# Altium PCB V5.pcbdoc
Units mil, origin at the board's own origin, x right, y up, seen from the top; angles counter-clockwise.
Board outline 9149.63 x 2076.45 mil, 2 copper layers (Top Layer, Bottom Layer); 46 components, 58 nets, 215 pads, 23 vias.
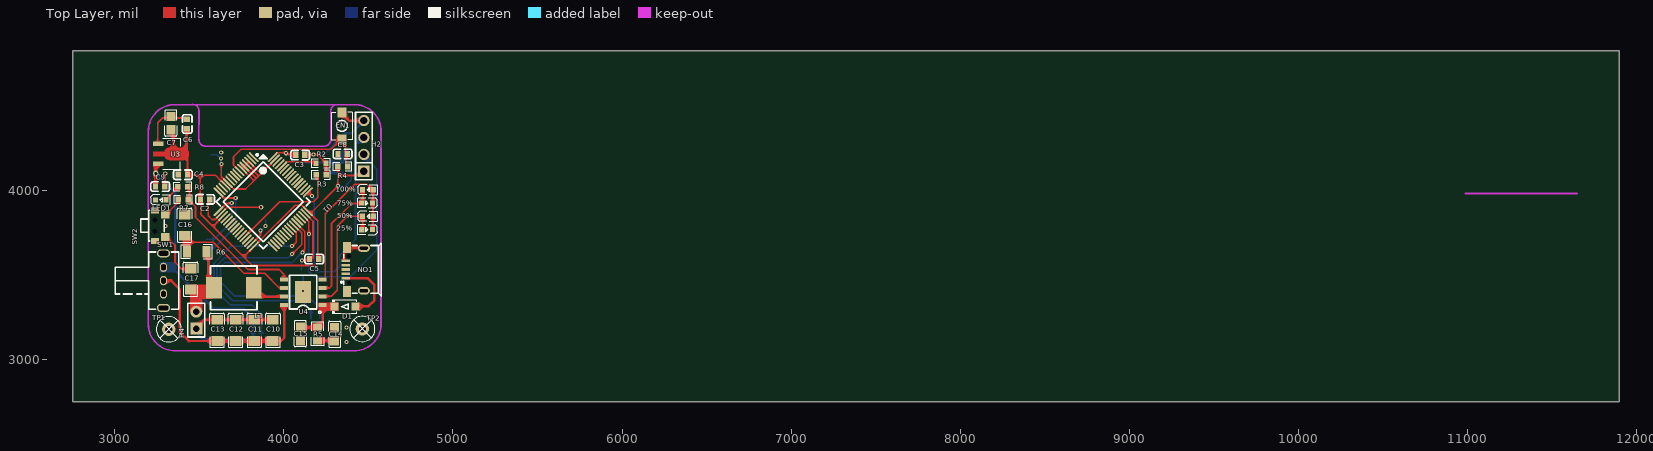
[diagram p0: Top Layer view]
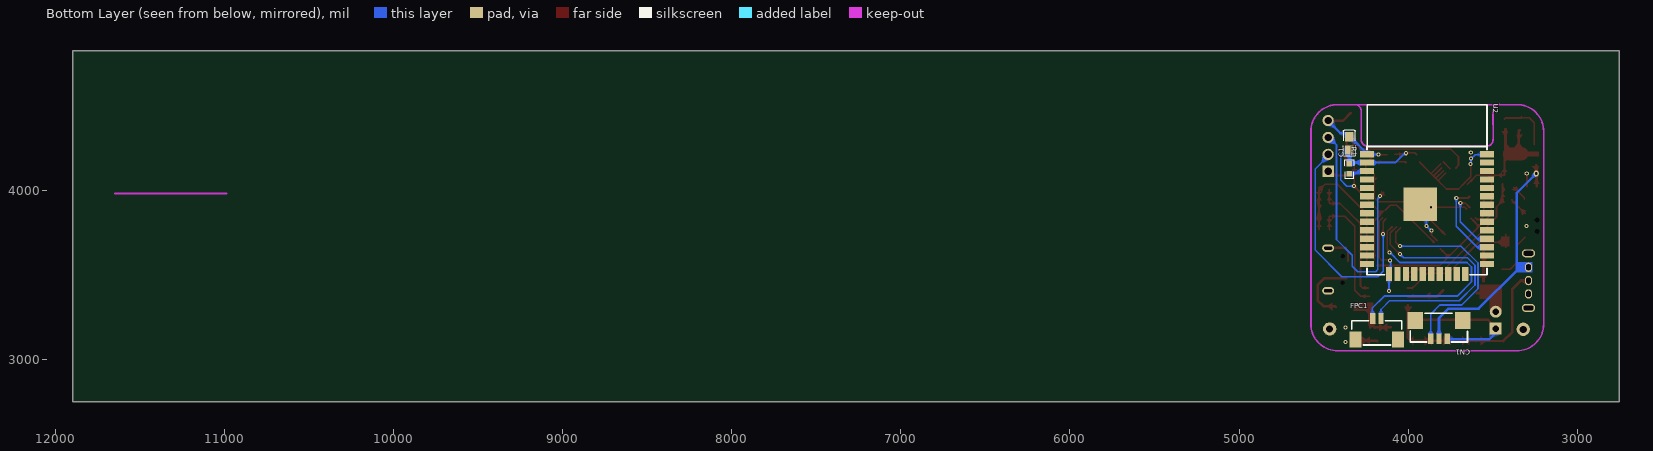
[diagram p1: Bottom Layer view, seen from below]

## Layer stack, top to bottom
Top Layer: signal copper (thickness not stored)
Dielectric: dielectric 12.6, FR-4, Dk 4.8
Bottom Layer: signal copper (thickness not stored)

## Board outline
11899.63,2750 2750,2750 2750,4826.45 11899.63,4826.45

## Components (designator, comment, footprint, x,y, rotation, side; value= is the part's Value field where it differs from the comment)
25% "19-217/GHC-YR1S2/3T" LED0603-RD 4492.49,3767.58 r180 top
50% "19-217/GHC-YR1S2/3T" LED0603-RD 4496.39,3845.94 r0 top
75% "19-217/GHC-YR1S2/3T" LED0603-RD 4492.49,3925.14 r180 top
100% "19-217/GHC-YR1S2/3T" LED0603-RD 4496.39,4003.5 r0 top
C1 "10uF" C0805 4348.06,4277.97 r90 bottom
C2 "104" C0603 3534.18,3946.59 r0 top
C3 "104" C0603 4096.66,4207.64 r0 top
C4 "104" C0603 3401.76,4092.08 r180 top
C5 "104" C0603 4178.86,3593.36 r180 top
C6 "104" C0603 3428.18,4392.18 r270 top
C7 "10uF" C0805 3330.9,4397.13 r90 top
C8 "104" C0603 4347.53,4215.42 r0 top
C9 "104" C0603 3267.96,4021.94 r180 top
C10 "C3216X5R1V226MTJ00E" C1206 3935.08,3171.52 r270 top
C11 "C3216X5R1V226MTJ00E" C1206 3824.84,3171.52 r270 top
C12 "C3216X5R1V226MTJ00E" C1206 3714.61,3171.52 r270 top
C13 "C3216X5R1V226MTJ00E" C1206 3604.37,3171.52 r270 top
C14 "GRM21BR61H106KE43L" C0805 4300.51,3148.73 r270 top
C15 "GRM21BR61H106KE43L" C0805 4097.14,3150.51 r90 top
C16 "C3216X5R1V226MTJ00E" C1206 3413.23,3794.18 r270 top
C17 "C3216X5R1V226MTJ00E" C1206 3447.86,3474.95 r270 top
CN1 "HC-1.25-3PLT" CONN-SMD_HC-1.25-3PLT 3817.61,3175.45 r0 bottom
D1 "SS14_C2909920" SOD-123FL_L2.8-W1.8-LS3.7-RD 4361.08,3311.51 r0 top
EN1 "TSA343G00-250J2" SW-SMD_L4.0-W2.9-LS5.0 4342.77,4380.98 r90 top
FPC1 "1.25-2PS" CONN-SMD_2P-P1.25_DEALON_1.25-2PS 4184.82,3179.15 r180 bottom
H2 "PH-00015" HDR-TH_4P-P2.54-V-M 4472.93,4262.57 r90 top
H4 "电源输入" HDR-TH_2P-P2.54-V-M-1 3481.8,3231.81 r90 top
L1 "FXL0618-1R0-M" IND-SMD_L7.0-W6.6 3703.43,3422.78 r180 top
LED1 "19-217/GHC-YR1S2/3T" LED0603-RD 3271.44,3943.17 r0 top
NO1 "MICROUSB-5PIN" USB-SMD_5P_MICROUSB-5PIN 4419.71,3531.75 r90 top
R1 "10k" R0603 4347.39,4127.14 r270 bottom
R2 "0603WAF1003T5E" R0603 4219.65,4159.81 r0 top
R3 "0603WAF1003T5E" R0603 4220.42,4091.93 r0 top
R4 "ERA3VEB1001V" R0603 4347.31,4141.24 r0 top
R5 "0805W8F200KT5E" R0805 4198.66,3150.58 r90 top
R6 "1206W4F500LT5E" R1206 3484.33,3636.82 r0 top
R7 "0603WAF1002T5E" R0603 3404.51,3945.59 r0 top
R8 "0603WAF200JT5E" R0603 3401.47,4021.22 r0 top
SW1 "SK-12D02-VG5_C136722" SW-TH_SK-12D02-VG5 3287.79,3465.8 r270 top
SW2 "TS24CA" SW-SMD_TS24CA 3267.19,3790.89 r90 top
TP1 "M2螺丝" M2螺丝 3319.05,3177.61 r0 top
TP2 "M2螺丝" M2螺丝 4463.85,3179.94 r0 top
U1 "STM32F103RCT6" LQFP-64_L10.0-W10.0-P0.50-LS12.0-BL 3877.67,3931.85 r225 top
U2 "ESP32-WROOM-32D-N4_C473012" WIFIM-SMD_39P-L25.5-W18.0-P1.27-BL 3887.77,3859.02 r270 bottom
U3 "AMS1117-3.3_C880752" SOT-89-3_L4.5-W2.5-P1.50-LS4.2-BR 3310.66,4215.71 r180 top
U4 "IP5306" ESOP-8_L4.9-W3.9-P1.27-LS6.0-BL-EP 4113.88,3397.99 r90 top

## Footprints (in the part's own frame and the unit in brackets; to place one, negate y for a bottom-side part, rotate by r counter-clockwise, add the part's x,y. Pads: shape width x height; smd on the part's side, far side on the other; paste and mask are expansions set on the pad)
C0603 [mm]
  rect 0.8x0.9 smd paste+0 mask+0.051: 1(-0.7,0) 2(0.7,0)
  silkscreen extent -1.41,-0.71 1.39,0.72
C0805 [mm]
  rect 1.41x1.35 smd paste-100 mask+0.051: 1(-1,0) 2(1,0)
  silkscreen extent -1.96,-0.9 1.96,0.9
C1206 [mm]
  rect 1.485x1.728 smd paste-100 mask+0.051: 1(-1.593,0) 2(1.593,0)
  silkscreen extent -2.56,-1.09 2.56,1.09
CONN-SMD_2P-P1.25_DEALON_1.25-2PS [mm]
  rect 0.8x1.6 smd paste+0 mask+0.05: 1(-0.625,1.6) 2(0.625,1.6)
  rect 1.8x2.4 smd paste+0 mask+0.05: 3(-3.175,-1.6) 4(3.175,-1.6)
  silkscreen extent -3.75,-2.4 3.75,1.25
CONN-SMD_HC-1.25-3PLT [mm]
  rect 0.8x1.6 smd paste+0 mask+0.05: 1(-1.25,1.38) 2(0,1.38) 3(1.25,1.38)
  rect 2.35x2.5 smd paste+0 mask+0.05: 4(-3.575,-1.38) 5(3.575,-1.38)
  silkscreen extent -4.3,-2.45 4.3,1.85
ESOP-8_L4.9-W3.9-P1.27-LS6.0-BL-EP [mm]
  rect 0.6x1.2 smd paste+0 mask+0.051: 1(-1.905,-2.908) 2(-0.635,-2.908) 3(0.635,-2.908) 4(1.905,-2.908) 5(1.905,2.908) 6(0.635,2.908) 7(-0.635,2.908) 8(-1.905,2.908)
  rect 3.3x2.4 smd paste+0 mask+0.051: 9(0,0)
  silkscreen extent -3.2,-2.67 2.55,2.05
HDR-TH_2P-P2.54-V-M-1 [mm]
  rect 1.8x1.8 hole 1 paste+0 mask+0.051: 1(-1.27,0)
  round 1.8 hole 1 paste+0 mask+0.051: 2(1.27,0)
  silkscreen extent -2.54,-1.27 2.54,1.27
HDR-TH_4P-P2.54-V-M [mm]
  rect 1.7x1.7 hole 1.1 paste+0 mask+0.051: 1(-3.81,0)
  round 1.7 hole 1.1 paste+0 mask+0.051: 2(-1.27,0) 3(1.27,0) 4(3.81,0)
  silkscreen extent -5.08,-1.27 5.08,1.27
IND-SMD_L7.0-W6.6 [mm]
  rect 2.4x3.2 smd paste+0 mask+0.051: 1(-3,0) 2(3,0)
  silkscreen extent -3.5,-3.3 3.5,3.3
LED0603-RD [mm]
  rect 0.8x0.8 smd paste+0 mask+0.051: 1(-0.799,-0.003) 2(0.799,0.003)
  silkscreen extent -1.49,-0.75 1.39,0.76
LQFP-64_L10.0-W10.0-P0.50-LS12.0-BL [mm]
  oval 0.3x2 smd paste+0 mask+0.051: 1(-3.75,-5.75) 2(-3.25,-5.75) 3(-2.75,-5.75) 4(-2.25,-5.75) 5(-1.75,-5.75) 6(-1.25,-5.75) 7(-0.75,-5.75) 8(-0.25,-5.75) 9(0.25,-5.75) 10(0.75,-5.75) 11(1.25,-5.75) 12(1.75,-5.75) 13(2.25,-5.75) 14(2.75,-5.75) 15(3.25,-5.75) 16(3.75,-5.75) 33(3.75,5.75) 34(3.25,5.75) 35(2.75,5.75) 36(2.25,5.75) 37(1.75,5.75) 38(1.25,5.75) 39(0.75,5.75) 40(0.25,5.75) 41(-0.25,5.75) 42(-0.75,5.75) 43(-1.25,5.75) 44(-1.75,5.75) 45(-2.25,5.75) 46(-2.75,5.75) 47(-3.25,5.75) 48(-3.75,5.75)
  oval 2x0.3 smd paste+0 mask+0.051: 17(5.75,-3.75) 18(5.75,-3.25) 19(5.75,-2.75) 20(5.75,-2.25) 21(5.75,-1.75) 22(5.75,-1.25) 23(5.75,-0.75) 24(5.75,-0.25) 25(5.75,0.25) 26(5.75,0.75) 27(5.75,1.25) 28(5.75,1.75) 29(5.75,2.25) 30(5.75,2.75) 31(5.75,3.25) 32(5.75,3.75) 49(-5.75,3.75) 50(-5.75,3.25) 51(-5.75,2.75) 52(-5.75,2.25) 53(-5.75,1.75) 54(-5.75,1.25) 55(-5.75,0.75) 56(-5.75,0.25) 57(-5.75,-0.25) 58(-5.75,-0.75) 59(-5.75,-1.25) 60(-5.75,-1.75) 61(-5.75,-2.25) 62(-5.75,-2.75) 63(-5.75,-3.25) 64(-5.75,-3.75)
  silkscreen extent -5,-5.79 5,5
M2螺丝 [mm]
  round 2 hole 1.07 mask+0.051: 1(0,0)
  silkscreen extent -1.9,-1.9 1.9,1.9
R0603 [mil]
  rect 31.75x34.02 smd paste-3937.01 mask+2: 1(-29.66,0) 2(29.66,0)
  silkscreen extent -55,-26 55,26
R0805 [mm]
  rect 1.133x1.377 smd paste-100 mask+0.051: 1(-1,0) 2(1,0)
  silkscreen extent -1.76,-0.92 1.76,0.92
R1206 [mil]
  rect 47.54x66.97 smd paste-3937.01 mask+2: 1(-58.22,0) 2(58.22,0)
  silkscreen extent -91,-42 91,42
SOD-123FL_L2.8-W1.8-LS3.7-RD [mm]
  rect 1.2x1.2 smd paste+0 mask+0.051: 1(-1.6,0) 2(1.6,0)
  silkscreen extent -1.9,-1 1.8,1
SOT-89-3_L4.5-W2.5-P1.50-LS4.2-BR [mm]
  rect 1.575x0.672 smd paste+0 mask+0.051: 1(1.356,-1.5) 3(1.356,1.5)
  Top Layer region: -2.283,0.95 -0.429,0.95 -0.384,0.949 -0.34,0.946 -0.296,0.94 -0.252,0.933 -0.208,0.924 -0.165,0.912 -0.123,0.899 -0.081,0.884 -0.04,0.866 0,0.847 0.04,0.826 0.078,0.803 0.115,0.779 0.151,0.752 0.185,0.724 0.219,0.695 0.251,0.664 0.281,0.631 0.31,0.597 0.337,0.562 0.362,0.525 0.386,0.488 0.408,0.449 0.428,0.409 0.447,0.33 2.144,0.33 2.144,-0.33 0.447,-0.33 0.428,-0.409 0.408,-0.449 0.386,-0.488 0.362,-0.526 0.337,-0.562 0.31,-0.597 0.281,-0.631 0.251,-0.664 0.219,-0.695 0.185,-0.725 0.151,-0.753 0.115,-0.779 0.078,-0.804 0.04,-0.827 0,-0.848 -0.04,-0.867 -0.081,-0.884 -0.123,-0.899 -0.165,-0.913 -0.208,-0.924 -0.252,-0.934 -0.296,-0.941 -0.34,-0.946 -0.384,-0.949 -0.429,-0.95 -2.283,-0.95 -2.328,-0.949 -2.372,-0.946 -2.416,-0.941 -2.46,-0.934 -2.504,-0.924 -2.547,-0.913 -2.589,-0.899 -2.631,-0.884 -2.672,-0.867 -2.713,-0.848 -2.752,-0.827 -2.79,-0.804 -2.827,-0.779 -2.863,-0.753 -2.898,-0.725 -2.931,-0.695 -2.963,-0.664 -2.993,-0.631 -3.022,-0.597 -3.049,-0.562 -3.075,-0.526 -3.098,-0.488 -3.12,-0.449 -3.141,-0.409 -3.159,-0.369 -3.175,-0.327 -3.189,-0.285 -3.202,-0.242 -3.212,-0.199 -3.22,-0.155 -3.227,-0.111 -3.231,-0.067 -3.233,-0.022 -3.233,0.022 -3.231,0.067 -3.227,0.111 -3.22,0.155 -3.212,0.199 -3.202,0.242 -3.189,0.285 -3.175,0.327 -3.159,0.369 -3.141,0.409 -3.12,0.449 -3.098,0.488 -3.075,0.525 -3.049,0.562 -3.022,0.597 -2.993,0.631 -2.963,0.664 -2.931,0.695 -2.898,0.724 -2.863,0.752 -2.827,0.779 -2.79,0.803 -2.752,0.826 -2.713,0.847 -2.672,0.866 -2.631,0.884 -2.589,0.899 -2.547,0.912 -2.504,0.924 -2.46,0.933 -2.416,0.94 -2.372,0.946 -2.328,0.949
  silkscreen extent -1.95,-2.33 0.7,2.33
SW-SMD_L4.0-W2.9-LS5.0 [mm]
  rect 1.53x1.36 smd paste+0 mask+0.051: 1(-2.035,0) 2(2.035,0)
  silkscreen extent -2.08,-1.58 2.08,1.58
SW-SMD_TS24CA [mm]
  rect 0.9x1.2 smd paste+0 mask+0.051: 1(-2.3,0.775) 2(2.3,0.775)
  rect 1.2x1.3 smd paste+0 mask+0.051: 3(-1.675,-0.775) 4(1.675,-0.775)
  Multi-Layer board cut-out: -0.85,0.425 -0.698,0.46 -0.576,0.557 -0.509,0.697 -0.509,0.853 -0.576,0.993 -0.698,1.09 -0.85,1.125 -0.85,1.125 -1.002,1.09 -1.124,0.993 -1.191,0.853 -1.191,0.697 -1.124,0.557 -1.002,0.46 -0.85,0.425
  Multi-Layer board cut-out: 0.85,0.425 1.002,0.46 1.124,0.557 1.191,0.697 1.191,0.853 1.124,0.993 1.002,1.09 0.85,1.125 0.85,1.125 0.698,1.09 0.576,0.993 0.509,0.853 0.509,0.697 0.576,0.557 0.698,0.46 0.85,0.425
  silkscreen extent -2.3,-0.62 2.3,2.88
SW-TH_SK-12D02-VG5 [mm]
  oval 1.4x1.1 hole 0.7 slot 0.9 at 0 deg copper offset 0.001,0 paste+0 mask+0.051: 1(-2,-0.001)
  oval 1.4x1.1 hole 0.7 slot 0.9 at 0 deg paste+0 mask+0.051: 2(0,0)
  oval 1.4x1.1 hole 0.7 slot 0.9 at 0 deg copper offset -0.001,0 paste+0 mask+0.051: 3(2,0.001)
  oval 1.2x2 hole 0.7 slot 1.5 at 90 deg copper offset 0,-0.001 paste+0 mask+0.051: 4(4.099,0)
  oval 1.2x2 hole 0.7 slot 1.5 at 90 deg copper offset 0,0 paste+0 mask+0.051: 5(-4.1,0)
  silkscreen extent -4.3,-7.25 4.3,2.27
USB-SMD_5P_MICROUSB-5PIN [mm]
  rect 0.4x1.3 smd paste-100 mask+0.05: 1(-1.3,1.345) 2(-0.65,1.345) 3(0,1.345) 4(0.65,1.345) 5(1.3,1.345)
  rect 1.6x1.2 smd paste-100 mask+0.05: 6(3.3,1.185) 7(-3.3,1.185)
  oval 1.1x1.8 hole 0.5 slot 1.2 at 90 deg paste+0 mask+0.05: 8(3.2,-1.345) 9(-3.2,-1.345)
  Multi-Layer board cut-out: 2,0.555 2.13,0.585 2.235,0.668 2.292,0.788 2.292,0.922 2.235,1.042 2.13,1.125 2,1.155 2,1.155 1.87,1.125 1.765,1.042 1.708,0.922 1.708,0.788 1.765,0.668 1.87,0.585 2,0.555
  Multi-Layer board cut-out: -2,0.525 -1.87,0.555 -1.765,0.638 -1.708,0.758 -1.708,0.892 -1.765,1.012 -1.87,1.095 -2,1.125 -2,1.125 -2.13,1.095 -2.235,1.012 -2.292,0.892 -2.292,0.758 -2.235,0.638 -2.13,0.555 -2,0.525
  silkscreen extent -3.99,-3.96 3.93,2.14
WIFIM-SMD_39P-L25.5-W18.0-P1.27-BL [mm]
  rect 0.95x2.1 smd paste+0 mask+0.051: 1(-9.015,-9) 2(-7.745,-9) 3(-6.475,-9) 4(-5.205,-9) 5(-3.935,-9) 6(-2.665,-9) 7(-1.395,-9) 8(-0.125,-9) 9(1.145,-9) 10(2.415,-9) 11(3.685,-9) 12(4.955,-9) 13(6.225,-9) 14(7.495,-9) 25(7.495,9) 26(6.225,9) 27(4.955,9) 28(3.685,9) 29(2.415,9) 30(1.145,9) 31(-0.125,9) 32(-1.395,9) 33(-2.665,9) 34(-3.935,9) 35(-5.205,9) 36(-6.475,9) 37(-7.745,9) 38(-9.015,9)
  rect 2.1x0.95 smd paste+0 mask+0.051: 15(9.015,-5.715) 16(9.015,-4.445) 17(9.015,-3.175) 18(9.015,-1.905) 19(9.015,-0.635) 20(9.015,0.635) 21(9.015,1.905) 22(9.015,3.175) 23(9.015,4.445) 24(9.015,5.715)
  rect 5x5 smd paste+0 mask+0.051: 39(-1.472,-1.017)
  silkscreen extent -16.44,-9.02 9.12,9.02

## Via types
v1: diameter 24, hole 12, Top Layer to Bottom Layer, 22 vias
v2: diameter 34, hole 17, Top Layer to Bottom Layer, 1 vias

## Nets (pads, with @x,y where several pads share a name; then routed paths per layer and width w, separated by ;. In a path a pad name is that pad's centre, name@x,y a point inside that pad or via, vN(x,y) a via of type N, cw(c..) or ccw(c..) an arc to the next point about the centre after c; other vN are vias at no path point)
3V3: C1.1 C2.1 C3.1 C4.1 C5.1 C6.2 C7.1 H2.1 R1.1 R4.1 U1.13 U1.19 U1.32 U1.48 U1.64 U2.2 | length 3826
  Top Layer w10: 3412.24,4217.11 3429.34,4200.01 C4.1@3429.34,4089.23 ; C4.1@3436.79,4087.88 3438.06,4089.14 3505.17,4089.14 ; C2.1@3505.17,3942.61 3505.17,4089.14 ; C2.1@3508.28,3940.6 3508.28,3858.27 3578.75,3788.18 ; U1.19@3627.89,3834.87 3581.19,3788.18 3578.75,3788.18 ; U1.13@3648.33,4036.3 3595.49,4089.14 3505.17,4089.14 ; 3761.44,3607.67 3762.96,3607.67 U1.32@3808.52,3653.23 ; U1.32@3845.84,3691.25 4066.49,3911.9 4105.13,3911.9 4134.2,3882.82 U1.48@4135.06,3882.82 ; U1.64@3948.93,4210.33 3961.54,4222.95 v1@4013.8,4222.95 ; v1(4013.01,4219.33) 4013.8,4220.12 v1@4013.8,4222.95 ; C3.1@4078.79,4213.53 4023.22,4213.53 v1@4013.8,4222.95 ; U1.48@4157.22,3861.11 4157.22,3862.73 4319.28,4024.79 4319.28,4087.93 ; U1.48@4165.07,3853.57 4199.26,3819.38 C5.1@4199.26,3590.14 ; 4185.22,3554.93 3812.66,3554.93 3578.75,3788.18 ; R4.1@4319.28,4140.77 4319.28,4087.93 ; H2.1@4450.12,4087.93 4319.28,4087.93
  Top Layer w15: C7.1@3340.77,4356.35 3346.78,4350.34 3346.78,4214.46 ; 3421.33,4219.27 3423.74,4221.67 C6.2@3423.74,4361.76
  Bottom Layer w10: v1(4013.01,4219.33) 4019.7,4219.33 4075.09,4163.94 U2.2@4242.62,4163.94 ; v1(4319.72,4024.74) 4363.03,4024.74 4398.82,4060.52 4398.82,4207.54 C1.1@4355.74,4250.62
  Bottom Layer w15: U2.2@4263.08,4164.41 4343.31,4164.41 R1.1@4344.23,4163.49 ; R1.1@4346.5,4161.67 4346.5,4229.6 C1.1@4352.89,4235.98
5V: C15.2 D1.1 R5.2 U4.1 | length 319.7
  Top Layer w15: C15.2@4102.11,3188.7 R5.2@4195.9,3188.7 ; R5.2@4197.25,3187.35 4230.17,3220.27 U4.1@4230.17,3322.17 ; U4.1@4234.68,3325.78 4309.53,3325.78 D1.1@4311.33,3323.98
$2N62477: FPC1.1 U1.43 | length 1488.8
  Top Layer w10: U1.43@4093.8,3785.13 4122.37,3756.56 4122.37,3649.28 4106.87,3633.78 4108.31,3633.78 v1(4108.84,3633.24)
  Bottom Layer w10: v1(4108.84,3633.24) 4048.72,3573.12 3651.88,3573.12 3625.27,3546.5 3625.27,3459.03 3709.97,3374.32 4141.38,3374.32 4211.45,3304.25 4211.45,3245.51 FPC1.1@4212.16,3244.8
$2N62479: FPC1.2 U1.42 | length 1460.5
  Top Layer w10: v1(4048.63,3622.99) 4048.63,3623.3 4105.15,3679.82 4105.15,3748.26 U1.42@4068.58,3784.82
  Bottom Layer w10: v1(4048.63,3622.99) 4026.23,3600.59 3648.91,3600.59 3604.43,3556.11 3604.43,3439.47 3697.98,3345.91 4109.72,3345.91 4160.61,3295.02 4160.61,3243.41 FPC1.2@4157.82,3240.62
$2N80053: C16.2 R6.1 U4.6 | length 774
  Top Layer w10: R6.1@3422.72,3659.44 3422.72,3691.25 ; C16.2@3422.72,3739.53 3422.72,3691.25 ; U4.6@4004.63,3422.51 3973.36,3422.51 3885.71,3510.16 3764.01,3510.16 3582.12,3692.05 3423.52,3692.05 3422.72,3691.25
$2N80054: L1.1 U4.7 | length 225.2
  Top Layer w15: L1.1@3790.87,3409.61 3828.96,3371.52 U4.7@4000.26,3371.52
$2N80056: C14.2 R5.1 | length 122.3
  Top Layer w15: R5.1@4182.37,3106.64 4185.98,3110.24 C14.2@4303.22,3110.24
$2N80057: 75%.2 100%.1 U4.3 | length 732.8
  Top Layer w10: U4.3@4235.88,3421.68 4269.25,3421.68 4280.97,3433.4 4280.97,3801.84 4402.34,3921.91 4456.87,3921.91 75%.2@4458.93,3923.97 ; 75%.2@4462.24,3921.29 4465.85,3924.9 100%.1@4465.85,4006.07
$2N80059: 25%.1 50%.2 75%.1 100%.2 U4.4 | length 975.4
  Top Layer w10: 4244.49,3486.14 4244.49,3861.23 4419.95,4036.69 4491.39,4036.69 4522.96,4005.13 100%.2@4523.86,4005.13 ; 25%.1@4525.37,3767.98 4527.17,3769.78 100%.2@4527.17,4002.46
$2N80060: 25%.2 50%.1 U4.2 | length 735.5
  Top Layer w10: U4.2@4227.76,3372.98 4280.07,3372.98 4316.14,3409.05 4316.14,3786.92 4375.66,3846.44 50%.1@4465.85,3846.44 ; 25%.2@4463.14,3767.08 4466.75,3770.69 50%.1@4466.75,3845.54
$2N80061: R7.1 SW2.4 | length 113.4
  Top Layer w10: SW2.4@3307.8,3862.53 3385.75,3940.49 R7.1@3385.75,3943.68
$2N80062: LED1.2 R8.1 | length 93.4
  Top Layer w10: LED1.2@3313.27,3948.35 3313.27,3956.56 3373.24,4016.53 R8.1@3373.58,4016.53
$2N80063: R7.2 R8.2 U4.5 | length 896.5
  Top Layer w10: R7.2@3437.84,3947.16 3437.84,3942.92 3477.25,3903.51 3477.25,3839.94 3785.91,3531.29 3971.86,3531.29 3999.83,3503.32 U4.5@3999.83,3478.09 ; R7.2@3441.37,3952.8 3441.37,4038.5
$2N80065: C10.2 C11.2 C12.2 C13.2 SW1.2 U4.8 | length 1209.7
  Top Layer w15: SW1.2@3292.2,3466.78 3332.35,3466.78 3383.34,3415.8 3383.34,3161.97 3437.41,3107.9 C13.2@3600.65,3109.3 ; C13.2@3599.79,3108.44 C13.2@3600.65,3109.3 ; C13.2@3600.69,3109.34 C13.2@3605.19,3109.34 ; C10.2@3940.68,3109.34 C13.2@3605.19,3109.34 ; C10.2@3944.29,3109.34 3983.97,3109.34 4002,3127.38 U4.8@4002,3320.37 ; C13.2@3600.65,3109.3 C13.2@3605.19,3109.34
BOOT0: R2.1 U1.60 | length 176
  Top Layer w10: U1.60@4012.54,4164.14 4018.01,4169.61 R2.1@4186.23,4169.61
BOOT1: R3.1 U1.28 | length 651.2
  Top Layer w10: U1.28@3779.53,3736.19 3976.15,3932.82 4175.49,3932.82 4199.97,3957.29 R3.1@4199.97,4096.5
CLK: U2.20
CMD: U2.19
EN: R1.2 U2.3 | length 112.6
  Bottom Layer w15: U2.3@4237.09,4102.86 4346.5,4102.86 R1.2@4348.78,4105.14
GND: C1.2 C2.2 C3.2 C4.2 C5.2 C6.1 C7.2 C8.1 C9.1 C10.1 C11.1 C12.1 C13.1 C14.1 C15.1 C16.1 C17.1 CN1.1 EN1.2 H2.4 H4.1 LED1.1 NO1.5 NO1.6 NO1.7 NO1.8 NO1.9 R2.2 R3.2 SW2.3 U1.3 U1.4 U1.5 U1.6 U1.12 U1.18 U1.31 U1.47 U1.63 U2.1 U2.15 U2.38 U2.39 U3.1 U4.9 | length 4337.7
  Top Layer w10: U3.1@3252.94,4271.03 3252.94,4398.73 3283.71,4429.5 3326.79,4429.5 C7.2@3331.41,4434.11 ; C9.1@3296.68,4021.88 3296.68,4097.1 v1(3298.05,4098.47) ; SW2.3@3308.41,3723.15 3355.59,3675.97 3355.59,3574.08 3395.94,3533.73 C17.1@3444.49,3533.73 ; C7.2@3331.41,4427.96 3423.72,4427.96 C6.1@3429.88,4421.81 ; C2.2@3552.67,3939.59 3552.67,3849.94 3575.03,3827.58 3592.71,3827.58 U1.18@3603.19,3838.07 ; v1(3629.93,4154.88) 3629.93,4081.03 U1.12@3663.43,4047.52 ; U1.18@3653.45,3888.74 3664.14,3899.42 3865.69,3899.42 v1@3865.89,3899.22 ; U1.12@3665.32,4044.31 3701.89,4007.74 3773.12,4007.74 3823.72,4058.35 ; U1.6@3750.42,4128.35 3752.24,4128.35 U1.3@3792.82,4168.92 ; U1.6@3776.52,4102.48 3820.64,4058.35 3823.72,4058.35 ; U1.5@3790.62,4116.33 3836.03,4070.92 3836.03,4070.66 ; U1.4@3800.63,4134.03 3848.09,4086.57 3851.94,4086.57 ; U1.3@3806.95,4155.85 3864.09,4098.71 ; U1.31@3828.23,3700.88 3861.55,3734.2 v1(3861.55,3761.1) ; U1.63@3931.86,4168.31 3931.86,4166.49 3864.09,4098.71 ; v1(4106.22,3585.14) 4110.33,3589.24 C5.2@4149.3,3589.24 ; C3.2@4122.81,4210.35 4173.87,4210.35 v1(4175.24,4211.71) 4196.67,4211.71 R2.2@4246.81,4161.57 ; U1.47@4151.74,3837.43 4171.91,3817.26 4171.91,3602.11 C5.2@4153.96,3584.16 ; R3.2@4246.4,4095.76 4250.77,4100.12 4250.77,4171.01 R2.2@4249.86,4171.92 ; NO1.5@4354.92,3581.3 4354.92,3636.31 NO1.6@4374.76,3656.15 ; 3823.72,4058.35 3836.03,4070.66 ; 3836.03,4070.66 3851.94,4086.57 ; 3851.94,4086.57 3864.09,4098.71
  Top Layer w15: H4.1@3478.52,3186.76 3525.71,3233.94 C13.1@3600.87,3233.94 ; C13.1@3605.2,3235.6 3942.48,3235.6 C10.1@3943.38,3236.5 ; EN1.2@4340.46,4456.91 4386.05,4411.32 H2.4@4472.67,4411.32 ; NO1.6@4370.25,3658.86 NO1.8@4477.57,3658.86
  Bottom Layer w10: U2.38@3567.01,4210.95 3603.26,4210.95 3627.87,4186.34 3627.87,4156.93 v1(3629.93,4154.88) ; v1(3861.55,3761.1) 3863.48,3761.1 v1(3891.98,3789.6) 3892.57,3790.19 U2.39@3892.57,3824.88 ; U2.15@4102.8,3531.12 4102.8,3581.72 v1(4106.22,3585.14) ; U2.15@4112.76,3496.6 4112.76,3406.34 v1(4114.13,3404.97) ; v1@4172.5,4211.71 4171.14,4213.08 v1@4181.17,4213.08 ; v1(4175.24,4211.71) 4179.8,4211.71 v1@4181.17,4213.08 ; U2.1@4226.95,4213.08 4225.13,4211.26 4182.99,4211.26 v1@4181.17,4213.08 ; U2.1@4238.76,4213.08 U2.1@4244.08,4213.08
  Bottom Layer w15: H4.1@3484.19,3175.65 3471.15,3175.65 3466.99,3171.49 3519.68,3118.81 3768.67,3118.81 CN1.1@3769.09,3119.23 ; U2.1@4226.95,4213.08 U2.1@4238.23,4213.08 ; U2.1@4238.23,4212.56 4238.76,4213.08 C1.2@4343.43,4317.75 ; C1.2@4361.43,4337.47 4399.73,4337.47 H2.4@4475.86,4413.6
  other v1: 4370.61,3101.83 4369.57,3187.52 3298.46,3787.86 3865.89,3899.82 3628.17,4188.37 3629.22,4223.89
IO0: U2.25
IO2: U2.24
IO4: U2.26
IO5: U2.29
IO12: U2.14
IO13: U2.16
IO14: U2.13
IO15: U2.23
IO16: U1.16 U2.27 | length 460.7
  Top Layer w10: U1.16@3634.59,3965.51 3645.77,3954.33 v1(3714.99,3954.33)
  Bottom Layer w10: U2.27@3558,3663.24 3591.37,3663.24 3715.02,3786.89 v1(3714.99,3954.33)
IO17: U1.17 U2.28 | length 372.3
  Top Layer w10: U1.17@3633.94,3896.75 3660.86,3923.67 v1(3691.34,3923.67)
  Bottom Layer w10: U2.28@3539.87,3710.94 3588.2,3710.94 3691.36,3814.09 v1@3691.36,3923.65
IO18: U2.30
IO19: U2.31
IO21: U2.33
IO22: U2.36
IO23: U2.37
IO25: U2.10
IO26: U2.11
IO27: U2.12
IO32: U2.8
IO33: U2.9
IO34: U2.6
IO35: U2.7
PA8: CN1.3 U1.41 | length 1263.8
  Top Layer w10: U1.41@4044.93,3778.06 4072.35,3750.63 4072.35,3693.22 v1(4048.95,3669.81)
  Bottom Layer w10: CN1.3@3865.93,3130.38 3865.93,3267.62 3812.41,3321.13 3683.28,3321.13 3586.68,3417.73 3586.68,3569.74 3686.92,3669.97 4048.79,3669.97 v1(4048.95,3669.81)
RESET: C8.2 EN1.1 R4.2 U1.7 | length 904.3
  Top Layer w10: U1.7@3717.85,4131.35 3701.37,4147.84 3701.37,4198.52 3746.13,4243.28 4278.82,4243.28 4326.69,4291.14 EN1.1@4349.25,4291.14 ; EN1.1@4360.58,4303.22 4363.77,4300.02 C8.2@4363.77,4228.45 ; C8.2@4365.44,4206.34 4365.44,4149.36 R4.2@4373.19,4141.61
RXD0: U2.34
SD0: U2.21
SD1: U2.22
SD2: U2.17
SD3: U2.18
SWCLK: H2.3 U1.49 | length 1457.3
  Top Layer w10: U1.49@4145.9,3986.87 4145.9,3985.65 v1(4164.97,3966.58)
  Bottom Layer w10: v1@4164.02,3966.35 v1@4164.97,3965.4 ; v1(4164.97,3966.58) v1@4164.97,3965.4 ; H2.3@4466.46,4312.14 4423.04,4268.71 4423.04,3709.44 4329.41,3615.81 4329.41,3550.16 4298.39,3519.14 4191.71,3519.14 4179.74,3531.11 4179.74,3950.63 v1@4164.97,3965.4
SWDIO: H2.2 U1.46 | length 1397
  Top Layer w10: U1.46@4130.37,3831.24 4147.8,3813.81 v1(4147.8,3742.35)
  Bottom Layer w10: v1(4147.8,3742.35) 4147.47,3742.01 4147.47,3520.27 4178.66,3489.08 4391.52,3489.08 4549.03,3646.59 4549.03,4125.6 H2.2@4471.4,4203.22 ; H2.2@4470.05,4204.58 H2.2@4471.4,4203.22 ; H2.2@4477.23,4209.05 H2.2@4471.4,4203.22
TXD0: U2.35
VBUS: D1.2 NO1.1 | length 401.6
  Top Layer w15: NO1.1@4366.55,3481 4495.01,3481 4535.09,3440.92 4535.09,3348.93 4500.62,3314.46 4430.88,3314.46 D1.2@4426.67,3310.25
VCCBAT: C17.2 H4.2 L1.2 R6.2 | length 441.4
  Top Layer w15: C17.2@3454.47,3403.27 3465.29,3392.45 C17.2@3469.35,3392.45 ; C17.2@3466.64,3411.38 3469.35,3408.68 C17.2@3469.35,3392.45 ; H4.2@3469.35,3289.76 C17.2@3469.35,3392.45 ; R6.2@3551.3,3635.04 3554.01,3632.33 L1.2@3554.01,3463.24 ; L1.2@3595.15,3393.8 3593.8,3392.45 C17.2@3469.35,3392.45
VCCIN: C9.2 CN1.2 SW1.1 U3.3 | length 1498.8
  Top Layer w15: C9.2@3240.31,4023.31 3240.31,4098.28 v2(3242.1,4100.07) 3241.16,4101 U3.3@3241.16,4147.69
  Bottom Layer w15: v2(3242.1,4100.07) 3356.73,3985.43 3356.73,3545.03 ; SW1.1@3294.31,3545.03 3356.73,3545.03 ; CN1.2@3822.04,3134.56 3817.16,3139.43 3817.16,3244.63 3762.13,3299.66 3582.59,3299.66 3356.73,3525.52 3356.73,3545.03
VN: U2.5
VP: U2.4
"": CN1.4 CN1.5 FPC1.3 FPC1.4 NO1.2 NO1.3 NO1.4 SW1.3 SW1.4 SW1.5 SW2.1 SW2.2 TP1.1 TP2.1 U1.1 U1.2 U1.8 U1.9 U1.10 U1.11 U1.14 U1.15 U1.20 U1.21 U1.22 U1.23 U1.24 U1.25 U1.26 U1.27 U1.29 U1.30 U1.33 U1.34 U1.35 U1.36 U1.37 U1.38 U1.39 U1.40 U1.44 U1.45 U1.50 U1.51 U1.52 U1.53 U1.54 U1.55 U1.56 U1.57 U1.58 U1.59 U1.61 U1.62 U2.32

## Polygon pours and split planes (outlines as drawn)
GND on Top Layer (solid, remove dead copper, pour order 0): 3092.95,3003.65 4643.85,3003.65 4643.85,4576.45 3092.95,4576.45
GND on Bottom Layer (solid, remove dead copper, pour order 1): 3096.65,3000 4647.5,3000 4647.5,4576.4 3096.65,4576.4

## Keep-outs
Board Outline Layer:
  lines w10 net "": 3459.31,4507.02 cw(c3461.31,4470.82) 3497.45,4467.81 ; 3497.17,4299.65 3497.49,4471.86 ; 3497.25,4301.4 ccw(c3535.23,4299.39) 3536.85,4261.39 ; 3533.29,4261.44 4243.17,4261.23 ; 4236.96,4261.22 ccw(c4238.96,4299.21) 4276.97,4300.83 ; 4277,4299.51 4277.18,4470.38 ; 4277.14,4466.56 cw(c4316.05,4468.02) 4317.5,4506.92 ; 10989.63,3980.61 11649.63,3980.61 ; 3198.06,3208.39 ccw(c3355.54,3208.39) 3355.54,3050.91 4417.37,3050.91 ccw(c4417.37,3208.39) 4574.85,3208.39 4574.85,4349.44 ccw(c4417.37,4349.44) 4417.37,4506.92 3355.54,4506.92 ccw(c3355.54,4349.44) 3198.06,4349.44 3198.06,3208.39

## Other copper
Top Layer:
  region net 5V: 4205.15,3287.96 4321.45,3287.96 4321.45,3334.56 4205.15,3334.56
  region net VCCBAT: 3446.35,3280.36 3517.72,3280.36 3517.72,3441.43 3446.35,3441.43
  region net VCCBAT: 3514.25,3359.83 3577.28,3359.83 3577.28,3441.23 3514.25,3441.23
  region net 3V3: 3565.67,3799.56 3592.11,3799.56 3592.56,3800.02 3592.56,3775.15 3592.77,3774.94 3590.28,3774.94
  region net 3V3: 3746.5,3621.62 3777.8,3621.62 3777.8,3590.31
  region net 3V3: 4319.98,4105.39 4338.01,4087.36 4338.62,4087.36 4319.98,4068.72
  region net 3V3: 4142.33,3877.83 4173.03,3877.83 4173.1,3846.82 4172.72,3845.31 4172.72,3847.13 4142.33,3877.52
  region net $2N80053: 3402.16,3668.83 3402.16,3727.04 3402.47,3727.35 3405.26,3724.57 3449.84,3724.57 3449.84,3668.52 3402.47,3668.52
  region net $2N80053: 3445.51,3712.25 3466.8,3697.29 3473.38,3692.74 3447.68,3670.86 3445.47,3668.8
  region net 3V3: 3479.56,4088.58 3505.98,4062.16 3505.98,4061.9 3531.58,4087.53 3532.37,4088.44
  region net 5V: 4256.02,3289.68 4230.37,3264.03 4204.88,3289.51 4204.88,3289.68
  region net VCCIN: 3247.81,4062.16 3232.81,4062.16 3224.65,4039.66 3256.15,4039.66
  region net 3V3: 3416.24,4326.37 3431.24,4326.37 3445.9,4348.87 3410.46,4348.87
  region net 3V3: 3339.28,4307.5 3354.28,4307.5 3357.48,4330 3320.53,4330
  region net BOOT0: 4021.54,4166.07 4014.47,4173.14 4008.51,4168.48 4016.86,4160.13
  region net SWCLK: 4154.33,3970.15 4161.4,3977.22 4159.63,3996.67 4134.88,3971.92
  region net 3V3: 4182.04,3843.68 4169.98,3856.69 4161.62,3848.34 4175.5,3836.08
  region net 3V3: 4174.72,3873.16 4167.65,3880.23 4148.21,3878.46 4171.71,3852.47
  region net SWDIO: 4144.27,3810.27 4151.34,3817.34 4142.14,3828.86 4133.79,3820.5
  region net $2N62477: 4112.61,3773.39 4100.38,3787.09 4092.02,3778.74 4105.24,3766.62
  region net PA8: 4068.82,3747.1 4075.89,3754.17 4072.54,3759.26 4064.18,3750.9
  region net 3V3: 3781.85,3633.63 3790.05,3627.69 3802.51,3639.55 3794.16,3647.9
  region net 3V3: 3862.04,3700.37 3854.93,3707.41 3841.49,3695.23 3849.84,3686.87
  region net BOOT1: 3806.33,3755.92 3799.38,3763.11 3785.81,3750.9 3794.16,3742.55
  region net 3V3: 3600.94,3815 3608.52,3808.43 3621.56,3820.5 3613.21,3828.86
  region net IO17: 3653.18,3908.91 3646.38,3916.25 3632.69,3904.02 3641.05,3895.67
  region net IO16: 3649.31,3957.87 3641.05,3968.04 3632.69,3959.68 3642.24,3950.8
  region net 3V3: 3614.86,4062.7 3627.13,4048.77 3635.48,4057.12 3622.53,4069.17
  region net 3V3: 4314.28,4109.23 4324.28,4109.23 4333.53,4124.23 4301.78,4124.23
  region net RESET: 4370.44,4182.71 4382.94,4197.71 4359.34,4197.71 4360.44,4182.71
  region net RESET: 4305.39,4276.92 4305.39,4262.78 4331.03,4270.74 4316,4330.97
  region net RESET: 4358.77,4255.74 4368.77,4255.74 4369.54,4270.74 4346.27,4270.74
  region net 3V3: 3510.17,3979.3 3500.17,3979.3 3490.87,3964.3 3522.36,3964.3
  region net 3V3: 3503.28,3913.87 3513.28,3913.87 3522.36,3928.87 3490.87,3928.87
  region net 3V3: 3434.34,4124.79 3424.34,4124.79 3413.57,4109.79 3445.07,4109.79
  region net 3V3: 3460.07,4084.14 3460.07,4094.14 3445.07,4106.64 3445.07,4074.36
  region net 3V3: 4204.26,3626.07 4194.26,3626.07 4190.68,3611.07 4216.76,3611.07
  region net $2N80056: 4251.43,3117.74 4251.43,3102.74 4273.93,3083.99 4273.93,3136.49
  region net 5V: 4146.22,3196.2 4123.72,3214.95 4123.72,3162.45 4146.22,3181.2
  region net 5V: 4149.05,3196.2 4149.05,3181.2 4171.55,3167.65 4171.55,3212.24
  region net 5V: 4235.47,3214.96 4224.86,3225.57 4185.02,3212.24 4225.76,3178.74
  region net $2N80056: 4248.26,3117.74 4225.76,3133.5 4225.76,3088.91 4248.26,3102.74
  region net $2N80060: 4471.75,3798.19 4461.75,3798.19 4449.25,3783.19 4476.76,3783.19
  region net $2N80059: 4532.17,3798.46 4522.17,3798.46 4509.67,3783.46 4539.71,3783.46
  region net $2N80059: 4532.17,3876.82 4522.17,3876.82 4512.12,3830.32 4543.61,3830.32
  region net $2N80059: 4532.17,3815.32 4543.61,3830.32 4512.12,3830.32 4522.17,3815.32
  region net $2N80060: 4434.17,3841.44 4449.17,3830.05 4449.17,3861.55 4434.17,3851.44
  region net $2N80060: 4471.75,3815.05 4480.66,3830.05 4449.25,3830.05 4461.75,3815.05
  region net $2N80057: 4430.27,3916.91 4445.27,3909.26 4445.27,3939.41 4430.27,3926.91
  region net $2N80057: 4470.85,3955.76 4460.85,3955.76 4448.35,3940.76 4476.76,3940.76
  region net $2N80059: 4532.17,3956.03 4522.17,3956.03 4509.67,3941.03 4539.71,3941.03
  region net $2N80059: 4532.17,3894.53 4539.71,3941.03 4509.67,3909.53 4522.17,3894.53
  region net $2N80059: 4505.17,4029.99 4501.51,4019.5 4512.12,3987.89 4533.45,4019.38
  region net $2N80059: 4532.17,3972.89 4543.61,3987.89 4512.12,3987.89 4522.17,3972.89
  region net $2N80057: 4470.85,3972.62 4480.66,3987.62 4449.17,3987.62 4460.85,3972.62
  region net 5V: 4222.67,3288.68 4237.67,3288.68 4252.01,3311.18 4204.76,3311.18
  region net 5V: 4274.51,3333.28 4252.01,3334.8 4252.01,3311.18 4274.51,3318.28
  region net $2N80060: 4267.01,3367.98 4267.01,3377.98 4252.01,3384.8 4252.01,3361.18
  region net $2N80057: 4267.01,3416.68 4267.01,3426.68 4252.01,3434.8 4252.01,3411.18
  region net $2N80063: 3994.83,3499.8 3982.33,3484.8 4017.33,3484.8 4004.83,3499.8
  region net $2N80053: 3973.36,3427.51 3973.36,3417.51 3975.76,3411.18 3975.76,3434.8
  region net $2N80054: 3953.26,3364.02 3975.76,3361.18 3975.76,3384.8 3953.26,3379.02
  region net $2N80065: 4009.5,3288.68 4023.01,3311.18 3975.76,3311.18 3994.5,3288.68
  region net $2N80053: 3417.72,3691.25 3427.72,3691.25 3440.22,3702.24 3405.22,3702.24
  region net $2N80065: 3878.56,3116.84 3878.56,3101.84 3901.06,3083.09 3901.06,3135.59
  region net $2N80065: 3983.97,3101.84 3983.97,3116.84 3969.09,3135.59 3969.09,3083.09
  region net $2N80065: 3768.33,3116.84 3768.33,3101.84 3790.83,3083.09 3790.83,3135.59
  region net $2N80065: 3881.36,3116.84 3858.86,3135.59 3858.86,3083.09 3881.36,3101.84
  region net $2N80065: 3658.09,3116.84 3658.09,3101.84 3680.59,3083.09 3680.59,3135.59
  region net $2N80065: 3771.12,3116.84 3748.62,3135.59 3748.62,3083.09 3771.12,3101.84
  region net $2N80065: 3547.85,3116.35 3547.85,3101.35 3570.35,3082.79 3570.35,3135.29
  region net $2N80065: 3660.88,3116.84 3638.38,3135.59 3638.38,3083.09 3660.88,3101.84
  region net $2N80054: 3891.28,3364.02 3891.28,3379.02 3868.78,3397.77 3868.78,3359.79
  region net VCCBAT: 3546.51,3508.27 3538.07,3485.77 3580.26,3485.77 3561.51,3508.27
  region net VCCBAT: 3515.57,3384.95 3538.07,3366.2 3538.07,3418.7 3515.57,3399.95
  region net VCCBAT: 3546.51,3580.84 3561.51,3580.84 3566.32,3603.34 3527.76,3603.34
  region net $2N80053: 3427.72,3685.31 3417.72,3685.31 3405.22,3670.31 3440.22,3670.31
  region net VCCBAT: 3504.37,3384.95 3504.37,3399.95 3481.87,3418.7 3481.87,3383.02
  region net VCCBAT: 3461.85,3360.52 3476.85,3360.52 3481.87,3383.02 3443.1,3383.02
  region net $2N80061: 3329.26,3891.06 3300.98,3880.46 3323.29,3853.27 3333.89,3881.56
  region net $2N80065: 3331.79,3474.28 3309.44,3471.69 3297.53,3440.53 3331.94,3459.28
  region net $2N80063: 3446.37,4038.5 3436.37,4038.5 3423.87,4038.23 3447,4038.23
  region net $2N80063: 3446.37,3989.22 3447,4038.23 3423.87,4004.22 3436.37,3989.22
  region net $2N80062: 3357.39,3993.61 3387.68,4004.22 3355.93,4023.97 3345.33,3995.69
  region net VCCIN: 3248.66,4120.92 3267.41,4143.42 3226.26,4143.42 3233.66,4120.92
  region net VBUS: 4470.2,3306.96 4470.2,3321.96 4447.7,3335.13 4447.7,3288.21
  region net 5V: 4251.97,3333.28 4251.97,3318.28 4274.47,3299.53 4274.47,3335.13
  region net 3V3: 4424.47,4092.93 4424.47,4082.93 4439.47,4079.11 4439.47,4105.43
  region net 3V3: 4038.36,4208.53 4053.36,4196.03 4053.36,4225.35 4038.36,4218.53
  region net $2N80063: 3446.37,3977.6 3436.37,3977.6 3423.87,3962.6 3450.04,3962.6
  region net $2N80063: 3455.72,3917.98 3460.65,3927.19 3450.04,3962.6 3427.43,3928.58
  region net $2N80061: 3356.17,3917.98 3370.31,3917.98 3390.72,3928.58 3358.97,3938.45
  region net BOOT0: 4159.11,4164.61 4174.11,4152.11 4174.11,4176.82 4159.11,4174.61
  region net BOOT1: 4204.97,4059.92 4206.63,4074.92 4182.47,4074.92 4194.97,4059.92
  region net VCCBAT: 3498.44,3313.1 3476.85,3344.3 3461.85,3338.66 3448.69,3294.41
  region net 3V3: 3434.34,4184.68 3429.64,4192.2 3411.84,4180.07 3424.34,4171.86
  region net 3V3: 3339.28,4275.61 3320.53,4252.45 3373.03,4253.11 3354.28,4275.61
  region net 3V3: 3416.24,4272.16 3397.49,4253.11 3424.74,4244.24 3431.24,4259.58
  region net VCCIN: 3254.21,4112 3248.66,4129.37 3233.66,4128.54 3228.74,4110.59
  region net VCCIN: 3228.23,4090.22 3232.81,4071.99 3247.81,4070.4 3253.59,4087.54
  region net IO17: 3683.4,3932.67 3670.94,3928.67 3670.94,3918.67 3683.4,3914.67
  region net IO16: 3707.05,3963.33 3694.59,3959.33 3694.59,3949.33 3707.05,3945.33
  region net SWDIO: 4156.8,3750.28 4152.8,3762.75 4142.8,3762.75 4138.8,3750.28
  region net SWCLK: 4165.72,3978.56 4154.08,3984.54 4147.01,3977.47 4152.99,3965.83
  region net PA8: 4060.92,3669.06 4066.91,3680.7 4059.84,3687.77 4048.19,3681.79
  region net $2N62479: 4060.62,3622.46 4066.5,3634.1 4059.3,3641.04 4047.66,3634.95
  region net $2N62477: 4120.8,3634.27 4125.91,3645.74 4117.92,3651.9 4106.33,3644.98
  region net 3V3: 4307.77,4025.84 4301.62,4014.2 4308.48,4006.92 4320.12,4012.74
  region net 3V3: 4328.42,4033 4324.28,4045.32 4314.28,4044.95 4310.44,4032.34
  region net 3V3: 4015.61,4207.61 4030.35,4208.53 4035.88,4218.53 4024.31,4223.37
  region net 3V3: 4015.61,4207.61 4030.35,4208.53 4035.88,4218.53 4024.31,4223.37
  region net 3V3: 4008.16,4230.3 3994.34,4227.95 3991.18,4217.95 4002.73,4213.14
Bottom Layer:
  region net VCCIN: 3265.75,3516 3364.64,3516 3364.64,3574.5 3265.75,3574.5
  region net 3V3: 4339,4188.35 4354,4188.35 4372.75,4210.85 4321.48,4210.85
  region net 3V3: 4385.24,4228.19 4374.63,4256.48 4370.76,4210.85 4385.24,4214.05
  region net 3V3: 4185.76,4158.94 4200.76,4146.44 4200.76,4181.44 4185.76,4168.94
  region net 3V3: 4305.94,4171.91 4283.44,4182.65 4283.44,4145.24 4305.94,4156.91
  region net EN: 4305.94,4095.36 4305.94,4110.36 4283.44,4129.11 4283.44,4095.24
  region net IO16: 3589.79,3668.24 3574.79,3680.74 3574.79,3645.74 3589.79,3658.24
  region net IO17: 3588.2,3715.94 3574.79,3728.44 3574.79,3695.24 3588.2,3705.94
  region net EN: 4307.88,4095.36 4330.38,4081.61 4330.38,4113.36 4307.88,4110.36
  region net 3V3: 4307.88,4171.91 4307.88,4156.91 4330.38,4140.93 4330.38,4172.68
  region net 3V3: 4339,4195.18 4330.38,4172.68 4364.4,4172.68 4354,4195.18
  region net VCCIN: 3331.92,3537.53 3331.84,3552.53 3309.44,3550.44 3296.45,3518.78
  region net SWDIO: 4463.22,4180.55 4503.17,4164.38 4511.91,4169.78 4505.92,4206.93
  region net SWCLK: 4440.08,4318.91 4426.67,4279.41 4432.83,4271.43 4470.75,4279.18
  region net VCCIN: 3824.66,3175.11 3809.66,3175.11 3801.86,3152.61 3833.36,3152.61
  region net PA8: 3870.93,3167.61 3860.93,3167.61 3851.07,3152.61 3882.57,3152.61
  region net $2N62477: 4206.45,3288.64 4193.95,3273.64 4225.18,3273.64 4216.45,3288.64
  region net $2N62479: 4155.61,3288.64 4144.46,3273.64 4175.96,3273.64 4165.61,3288.64
  region net VCCIN: 3241.03,4083.1 3257.23,4074.33 3267.83,4084.93 3259.06,4101.13
  region net IO17: 3682.35,3915.72 3686.36,3903.26 3696.36,3903.28 3700.35,3915.75
  region net IO16: 3706.01,3946.37 3710.02,3933.92 3720.02,3933.95 3724.01,3946.42
  region net SWDIO: 4138.59,3734.67 4142.47,3722.09 4152.47,3721.81 4156.58,3734.16
  region net SWCLK: 4163.39,3954.69 4175.02,3948.28 4182.58,3954.86 4176.97,3966.5
  region net PA8: 4041.13,3678.91 4028.61,3674.97 4028.48,3664.97 4040.89,3660.92
  region net $2N62479: 4036.66,3623.74 4030.67,3612.1 4037.74,3605.03 4049.38,3611.01
  region net $2N62477: 4096.87,3634 4090.88,3622.35 4097.95,3615.28 4109.59,3621.27
  region net 3V3: 4327.66,4015.74 4340.12,4019.74 4340.12,4029.74 4327.66,4033.74
  region net 3V3: 4017.04,4208.03 4028.6,4203.36 4032.64,4213.46 4023.72,4224.74